# EAGLE board henryfc v2 (EAGLE 9.6.2)

Size 30 x 30 mm. Coordinates in mm from the lower left corner, seen from the top.
Outline: 30,2.39 30,27.61 arc90 27.61,30 2.39,30 arc90 0,27.61 0,2.39 arc90 2.39,0 27.61,0 arc90 30,2.39
Outline: circle at 27,3 radius 2
Outline: circle at 3,3 radius 2
Outline: circle at 3,27 radius 2
Outline: circle at 27,27 radius 2
Copper layers (1+2*15+16): Top 0.035mm / dielectric 1.5mm / Route2 0.035mm / dielectric 0.15mm / Route15 0.035mm / dielectric 0.2mm / Bottom 0.035mm
Design rules "default *": minimum track width 6mil, minimum drill 0.35mm, track to track 6mil, track to pad 6mil, pad to pad 6mil, via to via 6mil, smd to smd 6mil, copper to edge 15mil, drill to drill 6mil, minimum pad ring 10mil, minimum via ring 8mil, stop-mask expansion 4mil, vias tented up to drill 0mil, thermal gap 10mil

## Footprints (pad centres in the part's own frame; a part is rotated, then mirrored left to right if it is on the bottom)
C0603 = smd 1.1 x 1: 1 -0.85,0; 2 0.85,0
C0402 = smd 0.7 x 0.9: 1 -0.65,0; 2 0.65,0
KBDELPS212QHRI24Z55510S = smd 0.7 x 0.5: 1 -0.558,0 | smd 1.05 x 0.5: 2 0.558,0
KRDELPS122UHVI26H3Q4 = smd 0.7 x 0.5: 1 -0.645,0 | smd 1.05 x 0.5: 2 0.47,0
R0603 = smd 1 x 1.1: 1 -0.85,0; 2 0.85,0
R0402 = smd 0.6 x 0.7: 1 -0.5,0; 2 0.5,0
TESTPOINT = smd 1.5 x 1.5: 1 0,0
SOT-23 = smd 0.7 x 0.9: 1 -0.95,-1; 2 0.95,-1; 3 0,1
SSOP5 = smd 0.6 x 1: 1 -0.95,-1.2; 2 0,-1.2; 3 0.95,-1.2; 4 0.95,1.2; 5 -0.95,1.2
SOT-223 = smd 1.2 x 1.4: 1 -2.3,-3; 2 0,-3; 3 2.3,-3 | smd 3.5 x 1.4: 4 0,3
LQFP64 = smd 0.3 x 1.2: 1 -3.75,-5.75; 2 -3.25,-5.75; 3 -2.75,-5.75; 4 -2.25,-5.75; 5 -1.75,-5.75; 6 -1.25,-5.75; 7 -0.75,-5.75; 8 -0.25,-5.75; 9 0.25,-5.75; 10 0.75,-5.75; 11 1.25,-5.75; 12 1.75,-5.75; 13 2.25,-5.75; 14 2.75,-5.75; 15 3.25,-5.75; 16 3.75,-5.75; 33 3.75,5.75; 34 3.25,5.75; 35 2.75,5.75; 36 2.25,5.75; 37 1.75,5.75; 38 1.25,5.75; 39 0.75,5.75; 40 0.25,5.75; 41 -0.25,5.75; 42 -0.75,5.75; 43 -1.25,5.75; 44 -1.75,5.75; 45 -2.25,5.75; 46 -2.75,5.75; 47 -3.25,5.75; 48 -3.75,5.75 | smd 1.2 x 0.3: 17 5.75,-3.75; 18 5.75,-3.25; 19 5.75,-2.75; 20 5.75,-2.25; 21 5.75,-1.75; 22 5.75,-1.25; 23 5.75,-0.75; 24 5.75,-0.25; 25 5.75,0.25; 26 5.75,0.75; 27 5.75,1.25; 28 5.75,1.75; 29 5.75,2.25; 30 5.75,2.75; 31 5.75,3.25; 32 5.75,3.75; 49 -5.75,3.75; 50 -5.75,3.25; 51 -5.75,2.75; 52 -5.75,2.25; 53 -5.75,1.75; 54 -5.75,1.25; 55 -5.75,0.75; 56 -5.75,0.25; 57 -5.75,-0.25; 58 -5.75,-0.75; 59 -5.75,-1.25; 60 -5.75,-1.75; 61 -5.75,-2.25; 62 -5.75,-2.75; 63 -5.75,-3.25; 64 -5.75,-3.75
MICRO-USB = smd 0.4 x 1.35: 1 -1.3,2.675; 2 -0.65,2.675; 3 0,2.675; 4 0.65,2.675; 5 1.3,2.675 | smd 1.9 x 1.8: 6 -3.15,0; 7 3.15,0
SSOP28 = smd 0.5 x 1.15: 1 -4.225,-2.85; 2 -3.575,-2.85; 3 -2.925,-2.85; 4 -2.275,-2.85; 5 -1.625,-2.85; 6 -0.975,-2.85; 7 -0.325,-2.85; 8 0.325,-2.85; 9 0.975,-2.85; 10 1.625,-2.85; 11 2.275,-2.85; 12 2.925,-2.85; 13 3.575,-2.85; 14 4.225,-2.85; 15 4.225,2.85; 16 3.575,2.85; 17 2.925,2.85; 18 2.275,2.85; 19 1.625,2.85; 20 0.975,2.85; 21 0.325,2.85; 22 -0.325,2.85; 23 -0.975,2.85; 24 -1.625,2.85; 25 -2.275,2.85; 26 -2.925,2.85; 27 -3.575,2.85; 28 -4.225,2.85 | smd 4.75 x 2.74: P$29 0,0
LGA16-3X3 = smd 0.35 x 0.25: 1 -1.225,1; 2 -1.225,0.5; 3 -1.225,0; 4 -1.225,-0.5; 5 -1.225,-1; 9 1.225,-1; 10 1.225,-0.5; 11 1.225,0; 12 1.225,0.5; 13 1.225,1 | smd 0.25 x 0.35: 6 -0.5,-1.225; 7 0,-1.225; 8 0.5,-1.225; 14 0.5,1.225; 15 0,1.225; 16 -0.5,1.225
ECX-32-XTAL = smd 1.3 x 1.1: 1 -1.15,-0.9; 2 1.15,-0.9; 3 1.15,0.9; 4 -1.15,0.9
3.2X2.5-XTAL = smd 1.4 x 1.2: 1 -1.1,-0.8; 2 1.1,-0.8; 3 1.1,0.8; 4 -1.1,0.8
BOOT_JUMPER = smd 1.6 x 0.8: 1 0,1; 2 0,-1
SOLDERPAD = smd 2.5 x 1.25: 1 0,0
SM07B-SRSS-TB = smd 0.6 x 1.55: 1 3,0; 2 2,0; 3 1,0; 4 0,0; 5 -1,0; 6 -2,0; 7 -3,0 | smd 1.2 x 1.8: M1 4.3,3.875; M2 -4.3,3.875

## Placement (x,y rotation side)
C1  10uF  [C0603]  23.1,5.2 0 top
C2  0.1uF  [C0603]  12.9,8.5 270 top
C3  0.1uF  [C0603]  19.5,7.1 180 top
C4  10uF  [C0603]  11.1,13.5 90 top
C5  1uF  [C0603]  13.9,11.2 0 top
C6  1uF  [C0603]  16.3,13.4 270 top
C7  0.1uF  [C0402]  5,23.8 0 top
C8  10nF  [C0402]  2.1,21.6 270 top
C9  0.1uF  [C0402]  2.6,23.8 0 top
C10  2.2uF  [C0402]  0.9,21.6 270 top
C11  0.1uF  [C0402]  20.7,25.5 0 top
C12  0.1uF  [C0402]  18.1,15.8 0 top
C13  0.1uF  [C0402]  6.4,17 180 top
C14  2.2uF  [C0402]  5.8,18.8 90 top
C15  1uF  [C0402]  11.8,28.9 0 top
C16  0.1uF  [C0402]  9.5,28.9 180 top
C17  0.1uF  [C0402]  7,27.1 90 top
C18  0.1uF  [C0402]  14.3,28.9 0 top
C19  0.1uF  [C0402]  20.2,21 270 top
C20  0.1uF  [C0402]  28.9,17.5 270 top
C21  0.1uF  [C0402]  28.9,15.2 270 top
C22  0.1uF  [C0402]  28.9,20 90 top
C23  22uF  [C0402]  28.9,22.4 90 top
C24  22uF  [C0402]  24,24.5 180 top
LED1  KB_DELPS2.12-QHRI-24-Z555-10-S  [KBDELPS212QHRI24Z55510S]  18,9.5 90 top
LED2  KR_DELPS1.22-UHVI-26-H3Q4  [KRDELPS122UHVI26H3Q4]  19.6,9.5 90 top
R1  1k  [R0603]  23.7,2.9 90 top
R2  3k  [R0603]  22.4,2.9 90 top
R3  1k  [R0603]  9,4.1 180 top
R4  3k  [R0603]  9,2.4 0 top
R5  10k  [R0402]  20.2,24.1 270 top
R6  75  [R0402]  28.9,13.1 90 top
R7  75  [R0402]  23.3,26.1 90 top
R8  10k  [R0402]  14.9,7.8 0 top
R9  1K  [R0402]  20.8,9.4 90 top
R10  1K  [R0402]  16.7,9.5 90 top
R11  1K  [R0402]  14.9,9 0 top
TP1  TESTPOINT  [TESTPOINT]  6.3,3.7 0 top
TP2  TESTPOINT  [TESTPOINT]  2.7,8.8 0 top
TP3  TESTPOINT  [TESTPOINT]  6.3,1.7 180 top
TP4  TESTPOINT  [TESTPOINT]  2.7,6.7 0 top
U$1  BAT54C  [SOT-23]  7.8,14.3 0 top
U$2  BUXXSD5WG-3.3V-LDO  [SSOP5]  13.8,13.4 270 top
U$3  LM317DCYR  [SOT-223]  25.7,9.8 270 top
U$4  LM317DCYR  [SOT-223]  8,8.7 90 top
U$5  STM32F722  [LQFP64]  12.9,21.8 180 top
U$6  MICRO-USB  [MICRO-USB]  1.5,14.2 270 top
U$7  MAX7456  [SSOP28]  24.7,18.9 270 top
U$8  ICM-20602  [LGA16-3X3]  4.3,21.7 0 top
U$9  ECX-32-8MHZ  [ECX-32-XTAL]  20.3,27.7 180 top
U$10  NX3225GA-27MHZ  [3.2X2.5-XTAL]  19,12.9 270 top
U$11  BOOT_JUMPER  [BOOT_JUMPER]  3.1,22.3 270 bottom
U$13  SOLDERPAD  [SOLDERPAD]  18.3,27.6 270 bottom
U$14  SOLDERPAD  [SOLDERPAD]  21.1,2 270 bottom
U$15  SOLDERPAD  [SOLDERPAD]  9.2,27.6 270 bottom
U$19  SOLDERPAD  [SOLDERPAD]  27.8,12.5 0 bottom
U$20  SOLDERPAD  [SOLDERPAD]  10.2,2 270 bottom
U$21  SOLDERPAD  [SOLDERPAD]  19.5,2 270 bottom
U$22  SOLDERPAD  [SOLDERPAD]  8.6,2 270 bottom
U$23  SOLDERPAD  [SOLDERPAD]  13.4,2 270 bottom
U$24  SOLDERPAD  [SOLDERPAD]  7,2 270 bottom
U$25  SOLDERPAD  [SOLDERPAD]  11.8,2 270 bottom
U$26  SOLDERPAD  [SOLDERPAD]  12.4,27.6 90 bottom
U$27  SOLDERPAD  [SOLDERPAD]  10.8,27.6 90 bottom
U$28  SOLDERPAD  [SOLDERPAD]  14,27.6 270 bottom
U$29  SOLDERPAD  [SOLDERPAD]  22.7,2 270 bottom
U$30  SOLDERPAD  [SOLDERPAD]  17.9,2 270 bottom
U$31  SOLDERPAD  [SOLDERPAD]  21.5,27.6 270 bottom
U$32  SOLDERPAD  [SOLDERPAD]  16.3,2 270 bottom
U$33  SOLDERPAD  [SOLDERPAD]  27.8,10.9 180 bottom
U$34  SOLDERPAD  [SOLDERPAD]  27.8,9.3 0 bottom
U$35  SOLDERPAD  [SOLDERPAD]  19.9,27.6 90 bottom
U$36  SOLDERPAD  [SOLDERPAD]  27.8,7.7 180 bottom
X1  SM07B-SRSS-TB  [SM07B-SRSS-TB]  16.1,5.3 180 top

## Library data of the parts
C1-C24 = rcl; SPICEPREFIX: C
LED1 = SamacSys_Parts; ARROW_PART_NUMBER: KB DELPS2.12-QHRI-24-Z555-10-S; DESCRIPTION: Standard LEDs - SMD Blue TOPLED E 1608; HEIGHT: mm; MANUFACTURER_NAME: OSRAM; MANUFACTURER_PART_NUMBER: KB DELPS2.12-QHRI-24-Z555-10-S; MOUSER_PART_NUMBER: 720-KBDELPS212A6350; MOUSER_PRICE-STOCK: https://www.mouser.co.uk/ProductDetail/OSRAM-Opto-Semiconductors/KB-DELPS212-QHRI-24-Z555-10-S?qs=OTrKUuiFdkb2rezknsx9mQ%3D%3D
LED2 = SamacSys_Parts; ARROW_PART_NUMBER: KR DELPS1.22-UHVI-26-H3Q4; DESCRIPTION: Standard LEDs - SMD Red TOPLED E 1608; HEIGHT: mm; MANUFACTURER_NAME: OSRAM; MANUFACTURER_PART_NUMBER: KR DELPS1.22-UHVI-26-H3Q4; MOUSER_PART_NUMBER: 720-KRDELPS122A5163; MOUSER_PRICE-STOCK: https://www.mouser.co.uk/ProductDetail/OSRAM-Opto-Semiconductors/KR-DELPS122-UHVI-26-H3Q4?qs=XeJtXLiO41Rxc1kIEv94zQ%3D%3D
R1-R11 = rcl; SPICEPREFIX: R
TP1-TP4 U$1-U$11 U$13-U$15 U$19-U$36 = HenryFC
X1 = con-jst

## Nets
3V3: C6.1 C8.1 C9.1 C10.1 C11.1 C12.1 C13.1 C14.1 C15.1 C16.1 C17.1 LED2.2 TP2.1 U$2.5 U$5.13 U$5.19 U$5.30 U$5.32 U$5.48 U$5.64 U$8.1 U$8.16 U$11.1
5V: C5.1 C19.1 C20.1 C22.1 TP1.1 U$1.3 U$2.1 U$2.3 U$7.3 U$7.21 U$7.24 U$15.1
5V_REG-A: R3.2 TP4.1 U$1.1 U$4.4
5V_REG-B: R1.2 TP3.1 U$3.4 U$13.1 U$14.1 U$25.1
5V_USB: U$1.2 U$6.1
BOOT: R5.2 U$5.60 U$11.2
CAM_S: C21.1 U$7.22 U$31.1
CURRENT_METER_ADC_PIN: U$5.24 X1.7
F7_N: U$5.6 U$9.1
F7_P: U$5.5 U$9.3
GND: C1.2 C2.2 C3.2 C4.2 C5.2 C6.2 C7.2 C8.2 C9.2 C10.2 C11.2 C12.2 C13.2 C14.2 C15.2 C16.2 C17.2 C18.2 C19.2 C20.2 C22.2 C23.2 R2.1 R4.1 R5.1 R6.1 R7.1 R9.2 R10.2 R11.1 U$2.2 U$5.12 U$5.18 U$5.31 U$5.47 U$5.63 U$6.5 U$6.6 U$6.7 U$7.4 U$7.20 U$7.23 U$8.7 U$8.8 U$8.9 U$8.10 U$8.11 U$8.12 U$8.13 U$8.15 U$19.1 U$20.1 U$21.1 U$27.1 U$35.1 X1.1
GYRO1_CS_PIN: U$5.10 U$8.5
GYRO1_EXTI_PIN: U$5.11 U$8.6
LED1: LED1.2 U$5.49
LED_STRIP: U$5.50 U$23.1
M1: U$5.37 X1.3
M2: U$5.38 X1.4
M3: U$5.39 X1.5
M4: U$5.40 X1.6
MAX7456_SPI_CS_PIN: U$5.28 U$7.8
N$1: R1.1 R2.2 U$3.1
N$2: R3.1 R4.2 U$4.1
N$3: C18.1 U$5.7
N$7: C23.1 U$7.25
N$9: C21.2 R6.2
N$10: C7.1 U$8.14
N$11: C24.2 R7.2
N$14: LED1.1 R10.1
N$15: LED2.1 R9.1
OSD_N: U$7.5 U$10.1
OSD_P: U$7.6 U$10.3
RX1: U$5.43 U$34.1
RX2: U$5.17 U$24.1
RX3: U$5.52 U$28.1
RX4: U$5.15 U$32.1
RX5: U$5.54
SPI1_MISO_PIN: U$5.22 U$8.4
SPI1_MOSI_PIN: U$5.23 U$8.3
SPI1_SCK_PIN: U$5.21 U$8.2
SPI2_MISO_PIN: U$5.35 U$7.11
SPI2_MOSI_PIN: U$5.36 U$7.9
SPI2_SCK_PIN: U$5.34 U$7.10
TX1: U$5.42 U$36.1
TX2: U$5.16 U$22.1
TX3: U$5.51 U$26.1
TX4: U$5.14 U$30.1
TX5: U$5.53
USBDATA_N: U$5.44 U$6.2
USBDATA_P: U$5.45 U$6.3
VBAT_ADC_PIN: R8.1 R11.2 U$5.8
VCC: C1.1 C2.1 C3.1 C4.1 R8.2 U$3.3 U$4.3 U$33.1 X1.2
VTX_S: C24.1 U$7.26 U$29.1

## Tracks (layer width: path | path; a pad name or v marks a point on that pad's centre or on a via)
3V3  (22 unrouted)
5V  (11 unrouted)
5V_REG-A  (3 unrouted)
5V_REG-B  (5 unrouted)
5V_USB  (1 unrouted)
BOOT  (2 unrouted)
CAM_S  (2 unrouted)
CURRENT_METER_ADC_PIN  (1 unrouted)
F7_N  (1 unrouted)
F7_P  (1 unrouted)
GND  (55 unrouted)
GYRO1_CS_PIN  (1 unrouted)
GYRO1_EXTI_PIN  (1 unrouted)
LED1  (1 unrouted)
LED_STRIP  (1 unrouted)
M1  (1 unrouted)
M2  (1 unrouted)
M3  (1 unrouted)
M4  (1 unrouted)
MAX7456_SPI_CS_PIN  (1 unrouted)
N$1  (2 unrouted)
N$2  (2 unrouted)
N$3  (1 unrouted)
N$7  (1 unrouted)
N$9  (1 unrouted)
N$10  (1 unrouted)
N$11  (1 unrouted)
N$14  (1 unrouted)
N$15  (1 unrouted)
OSD_N  (1 unrouted)
OSD_P  (1 unrouted)
RX1  (1 unrouted)
RX2  (1 unrouted)
RX3  (1 unrouted)
RX4  (1 unrouted)
SPI1_MISO_PIN  (1 unrouted)
SPI1_MOSI_PIN  (1 unrouted)
SPI1_SCK_PIN  (1 unrouted)
SPI2_MISO_PIN  (1 unrouted)
SPI2_MOSI_PIN  (1 unrouted)
SPI2_SCK_PIN  (1 unrouted)
TX1  (1 unrouted)
TX2  (1 unrouted)
TX3  (1 unrouted)
TX4  (1 unrouted)
USBDATA_N  (1 unrouted)
USBDATA_P  (1 unrouted)
VBAT_ADC_PIN  (2 unrouted)
VCC  (8 unrouted)
VTX_S  (2 unrouted)

## Text on the board
bNames: RX | cam | VTX